# Altium PCB NPCB-CW308T-CC2538.PcbDoc
Units mil, origin at the board's own origin, x right, y up, seen from the top; angles counter-clockwise.
Board outline 2060 x 2540 mil, 2 copper layers (Top Layer, Bottom Layer); 40 components, 52 nets, 216 pads, 164 vias.
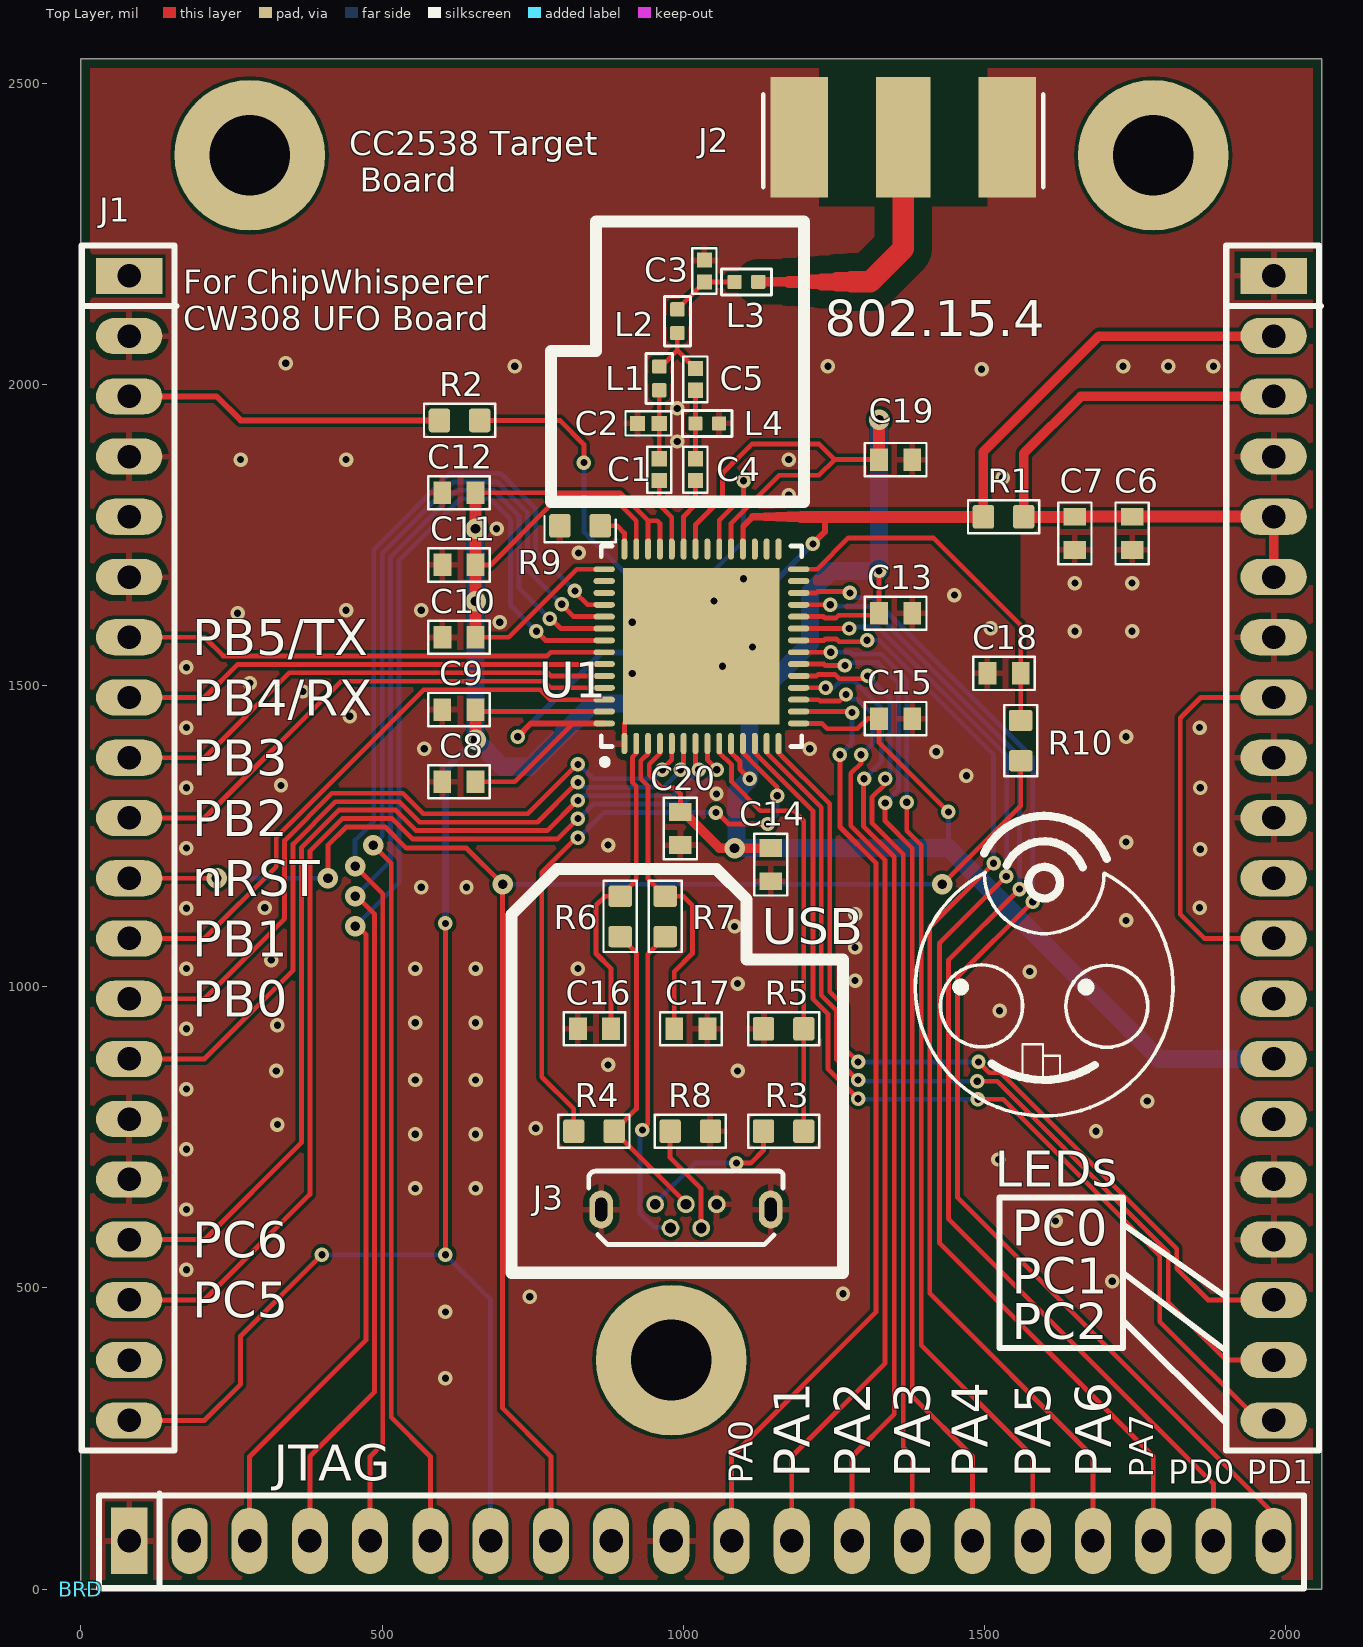
[diagram p0: Top Layer view]
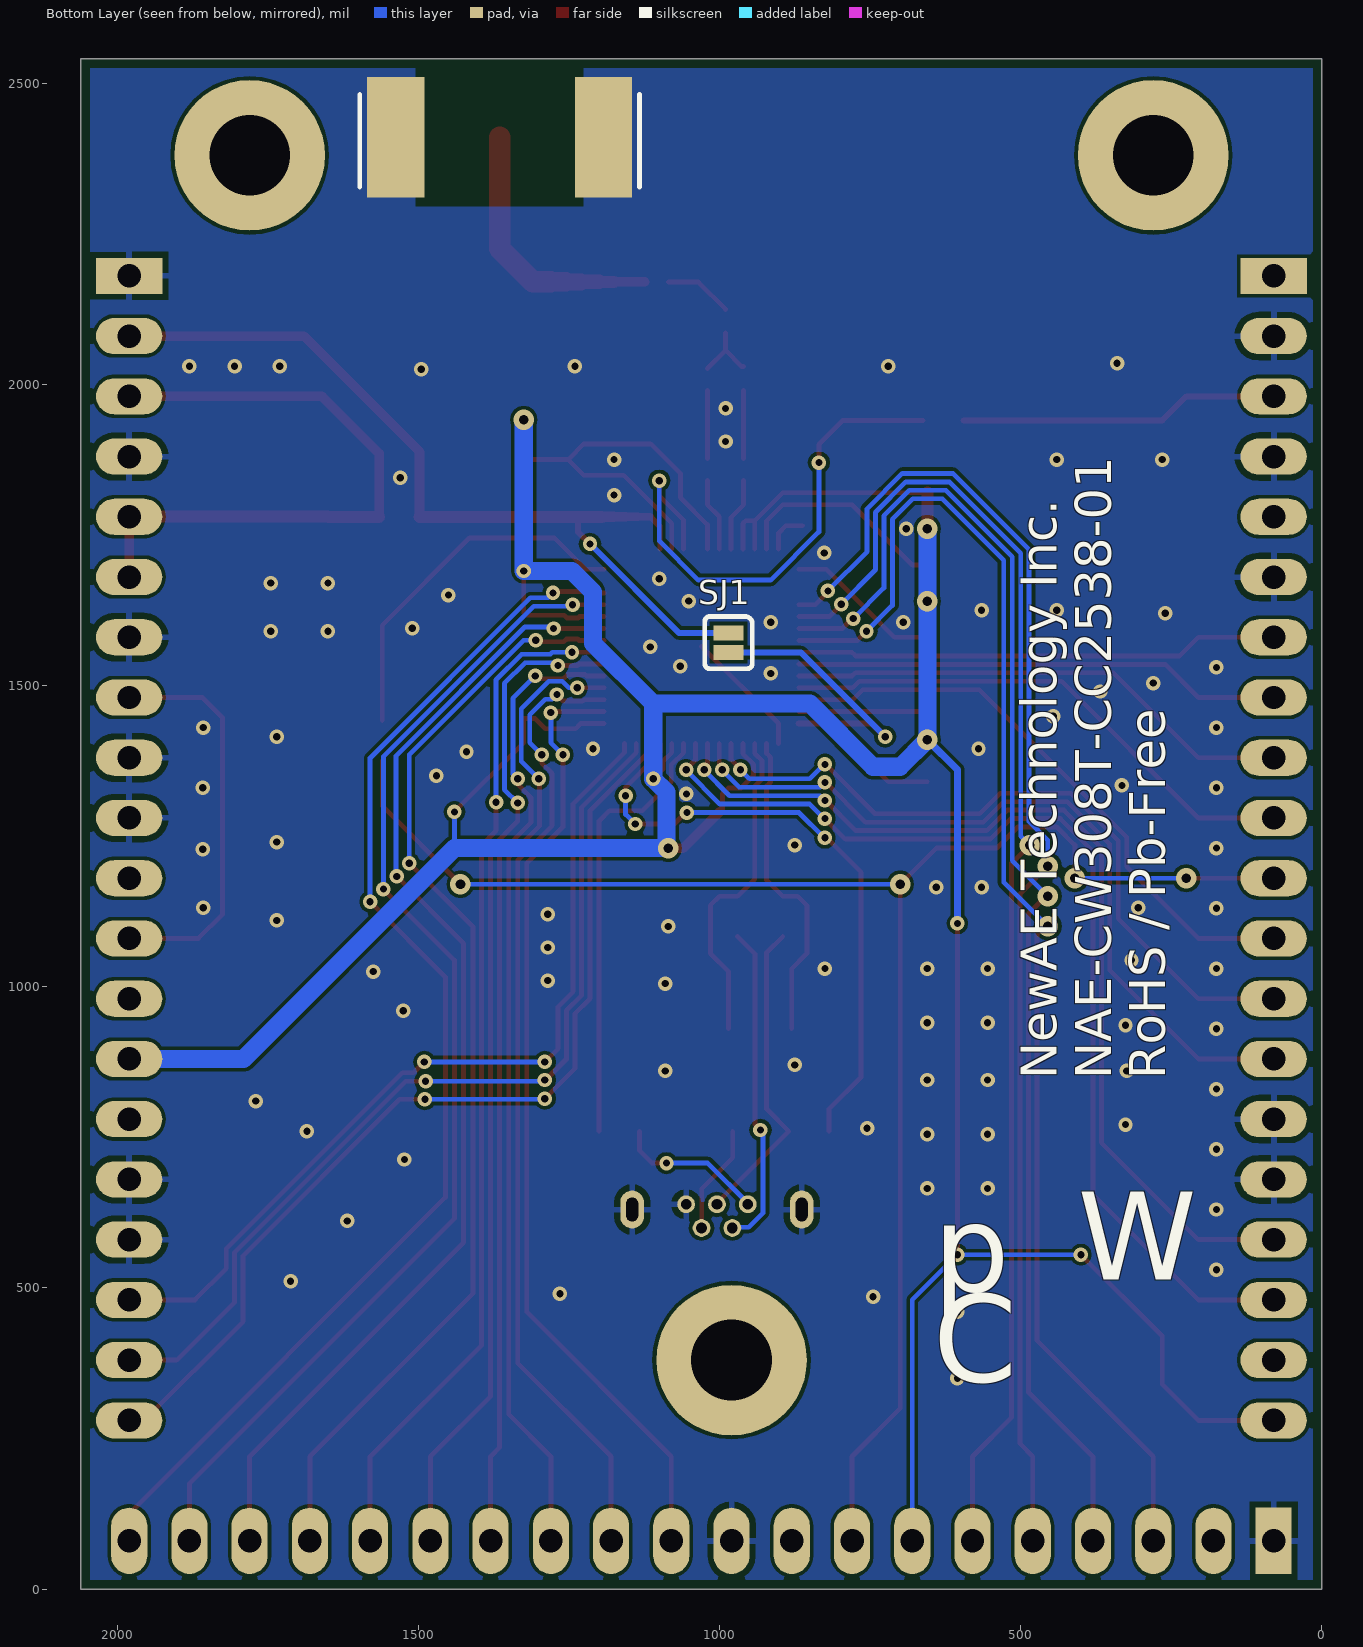
[diagram p1: Bottom Layer view, seen from below]

## Layer stack, top to bottom
Top Solder: solder mask 0.4, Solder Resist, Dk 3.5
Top Layer: signal copper 1.4
Dielectric 1: dielectric 12.6, FR-4, Dk 4.8
Bottom Layer: signal copper 1.4
Bottom Solder: solder mask 0.4, Solder Resist, Dk 3.5

## Board outline
0,0 0,2540 2060,2540 2060,0

## Design rules (kind name [scope] priority, off if disabled: settings)
BoardOutlineClearance J1_edge [InComponent('J1')] p1: gap=15 ignorepadtopadclearanceinfootprint=FALSE except(0: Arc-OutlineEdge Arc-SplitContinuation Track-SplitContinuation SMDPad-SplitContinuation THPad-SplitContinuation Via-SplitContinuation Fill-SplitContinuation Poly-SplitContinuation Region-SplitContinuation Text-SplitContinuation)
BoardOutlineClearance [All] p2: gap=15 ignorepadtopadclearanceinfootprint=FALSE except(0: Arc-SplitContinuation Track-SplitContinuation SMDPad-SplitContinuation THPad-SplitContinuation Via-SplitContinuation Fill-SplitContinuation Poly-SplitContinuation Region-SplitContinuation Text-SplitContinuation)
Clearance Clearance_FL [InNet('NetJ2_1')] p1: gap=6 ignorepadtopadclearanceinfootprint=TRUE except(0: Arc-Hole Track-Hole SMDPad-Hole THPad-Hole Via-Hole Fill-Hole Poly-Hole Region-Hole Text-Hole; 30: Arc-Fill Arc-Poly Arc-Region Track-Fill Track-Poly Track-Region)
Clearance [All] p2: gap=6 ignorepadtopadclearanceinfootprint=FALSE except(0: Arc-Hole Track-Hole SMDPad-Hole THPad-Hole Via-Hole Fill-Hole Poly-Hole Region-Hole Text-Hole)
HoleSize [All] p1: absolutevalues=TRUE maxlimit=200 minlimit=1 maxpercent=80.000 minpercent=20.000
MinimumSolderMaskSliver [All] p1: minsoldermaskwidth=5
PasteMaskExpansion PasteMaskExpansion_Nopaste [HasFootprint('CON-SMAM-PCB-EDGE062')] p1: expansion=-3937.01
PasteMaskExpansion [All] p2: expansion=0
PlaneConnect PlaneConnect_viaDirect [IsVia] p1: planeconnectstyle=Direct reliefexpansion=20 reliefentries=4 reliefconductorwidth=10 reliefairgap=10
PlaneConnect [All] p2: planeconnectstyle=Relief reliefexpansion=20 reliefentries=4 reliefconductorwidth=10 reliefairgap=10
PolygonConnect PolygonConnect_Directpart [HasFootprint('CON-SMAM-PCB-EDGE062') vs InNet('GND')] p1: connectstyle=Direct reliefconductorwidth=10 reliefentries=4 polygonreliefangle="90 Angle" airgapwidth=10
PolygonConnect PolygonConnect_viaDirect [All vs isVia] p2: connectstyle=Direct reliefconductorwidth=10 reliefentries=4 polygonreliefangle="90 Angle" airgapwidth=10
PolygonConnect [All] p3: connectstyle=Relief reliefconductorwidth=10 reliefentries=4 polygonreliefangle="90 Angle" airgapwidth=10
RoutingVias [All] p1: holewidth=28 width=50 viastyle="Through Hole" minholewidth=28 minwidth=50 maxholewidth=28 maxwidth=50 useviatemplates=TRUE viatemplateguid#1={00A2C811-F6DA-48CE-8B57-BE79917F5FCD} viatemplateguid#2={89223513-5D08-470A-9AA5-B5F4B4421E0B} viatemplateguid#3={82319E6E-4928-43D1-83BD-6C075DB5353F} viatemplatename#1=v61h30m0mx0 viatemplatename#2=v86h41m0mx0 viatemplatename#3=v127h71m0mx0
SilkToSilkClearance [All] p1: silktosilkclearance=5
SilkToSolderMaskClearance [IsPad] p1: minsilkscreentomaskgap=5 clearancetoexposedcopper=TRUE
SolderMaskExpansion [All] p1: expansion=4
Width Width_Power [InNet('VCC')] p1: maxlimit=50 minlimit=6 preferedwidth=20
Width [All] p2: maxlimit=100 minlimit=6 preferedwidth=8 minimp=50.000000 maximp=50.000000 favimp=50.000000
24 further rules are at their usual default settings.

## Classes and differential pairs
component class CW308T_CC2538_UFO: BRD J1

## Components (designator, comment, footprint, x,y, rotation, side; value= is the part's Value field where it differs from the comment)
BRD "" CW308T_TBOARD_DEFSIZE 0,0 r0 top locked
C1 "18p" CAPC0402_M 960,1858.11 r90 top
C2 "1p" CAPC0402_M 941.89,1935 r0 top
C3 "1p2" CAPC0402_M 1035,2188.11 r90 top
C4 "18p" CAPC0402_M 1020,1858.11 r90 top
C5 "1p" CAPC0402_M 1020,2008.11 r90 top
C6 "1u" CAPC0603_M 1745,1752.56 r270 top
C7 "100n" CAPC0603_M 1650,1752.56 r270 top
C8 "1u" CAPC0603_M 627.44,1340 r180 top
C9 "100n" CAPC0603_M 627.44,1460 r180 top
C10 "100n" CAPC0603_M 627.56,1580 r180 top
C11 "100n" CAPC0603_M 627.56,1700 r180 top
C12 "100n" CAPC0603_M 627.44,1820 r180 top
C13 "100n" CAPC0603_M 1352.56,1620 r0 top
C14 "100n" CAPC0603_M 1145,1202.56 r270 top
C15 "100n" CAPC0603_M 1352.44,1445 r0 top
C16 "47p" CAPC0603_M 852.44,930 r180 top
C17 "47p" CAPC0603_M 1012.44,930 r0 top
C18 "1n" CAPC0603_M 1532.44,1520 r180 top
C19 "100n" CAPC0603_M 1352.56,1875 r0 top
C20 "100n" CAPC0603_M 995,1262.56 r270 top
J1 "" CW308_TBOARD_CONN 80,2180 r0 top locked
J2 "CON-SMA-PCBEDGE-003.062" CON-SMAM-PCB-EDGE062 1365,2410 r90 top
J3 "614105150721" 614105150721 953.07,638.66 r0 top
L1 "2n" RESC1005X40N 960,2009.68 r90 top
L2 "2n" RESC1005X40N 990,2104.68 r90 top
L3 "3n3" RESC1005X40N 1104.68,2170 r0 top
L4 "2n" RESC1005X40N 1039.68,1935 r180 top
R1 "22R" RESC1608X55N 1531.54,1780 r0 top
R2 "100R" RESC1608X55N 628.46,1940 r180 top
R3 "47k" RESC1608X55N 1166.54,760 r0 top
R4 "1k5" RESC1608X55N 851.54,760 r180 top
R5 "68k" RESC1608X55N 1166.54,930 r180 top
R6 "33R" RESC1608X55N 895,1116.54 r270 top
R7 "33R" RESC1608X55N 970,1116.54 r90 top
R8 "1k5" RESC1608X55N 1011.54,760 r0 top
R9 "56k" RESC1608X55N 828.46,1765 r0 top
R10 "2k2" RESC1608X55N 1560,1408.46 r90 top
SJ1 "NO" SJ_2S_NO 985,1571.22 r270 bottom
U1 "CC2538SF53RT" QFN50P800X800X100_HS-57M 1030,1565 r90 top value=Value

## Footprints (in the part's own frame and the unit in brackets; to place one, negate y for a bottom-side part, rotate by r counter-clockwise, add the part's x,y. Pads: shape width x height; smd on the part's side, far side on the other; paste and mask are expansions set on the pad)
614105150721 [mm] "Upright USB"
  round 0.75 hole 0.45: 1(0,0) 2(0.65,-1) 3(1.3,0) 4(1.95,-1) 5(2.6,0)
  rrect100% 1x1.6 hole 0.5 slot 1 at 90 deg: S1(-2.275,-0.22) S2(4.875,-0.22)
  silkscreen extent -2.8,-1.7 5.4,1.4, body extent -2.7,-1.6 5.3,1.3, height 5.66
CAPC0402_M [mm] "Chip Capacitor, 2-Leads, Body 0402, IPC Medium Density"
  rect 0.64x0.64 smd mask+0.06: 1(-0.46,0) 2(0.46,0)
  silkscreen extent -0.97,-0.51 0.97,0.51, body extent -0.55,-0.3 0.55,0.3, height 0.6
CAPC0603_M [mm]
  rect 0.75x0.95 smd: 1(-0.7,0) 2(0.7,0)
  silkscreen extent -1.3,-0.7 1.3,0.7, body extent -0.85,-0.45 0.85,0.45, height 0.9
CON-SMAM-PCB-EDGE062 [mm] "Connector, SMA Edge Mount for 0.062\" Thick Board, 5-Lead"
  rect 5.08x2.29 smd: 1(0,0)
  rect 5.08x2.415 smd: 2(0,-4.383) 5(0,4.383)
  rect 5.08x2.415 smd far side: 3(0,-4.383) 4(0,4.383)
  silkscreen extent -2.1,-5.9 1.8,5.9, body extent -2.15,-4.8 15.3,4.72, height 4.34
CW308_TBOARD_CONN [mil]
  rect 110x60 hole 39: A1(0,0) C1(1900,0)
  oval 110x60 hole 39: A2(0,-100) A3(0,-200) A4(0,-300) A5(0,-400) A6(0,-500) A7(0,-600) A8(0,-700) A9(0,-800) A10(0,-900) A11(0,-1000) A12(0,-1100) A13(0,-1200) A14(0,-1300) A15(0,-1400) A16(0,-1500) A17(0,-1600) A18(0,-1700) A19(0,-1800) A20(0,-1900) C2(1900,-100) C3(1900,-200) C4(1900,-300) C5(1900,-400) C6(1900,-500) C7(1900,-600) C8(1900,-700) C9(1900,-800) C10(1900,-900) C11(1900,-1000) C12(1900,-1100) C13(1900,-1200) C14(1900,-1300) C15(1900,-1400) C16(1900,-1500) C17(1900,-1600) C18(1900,-1700) C19(1900,-1800) C20(1900,-1900)
  rect 60x110 hole 39: B1(0,-2100)
  oval 60x110 hole 39: B2(100,-2100) B3(200,-2100) B4(300,-2100) B5(400,-2100) B6(500,-2100) B7(600,-2100) B8(700,-2100) B9(800,-2100) B10(900,-2100) B11(1000,-2100) B12(1100,-2100) B13(1200,-2100) B14(1300,-2100) B15(1400,-2100) B16(1500,-2100) B17(1600,-2100) B18(1700,-2100) B19(1800,-2100) B20(1900,-2100)
  round 250 hole 134: MH1(200,200) MH2(1700,200) MH3(900,-1800)
  silkscreen extent -79,-2179 1979,50, body extent -50,-2149 1950,50, height 48
CW308T_TBOARD_DEFSIZE [mil] "Default CW308T Board Size"
  body extent 80,2523 90,2538, height 1
QFN50P800X800X100_HS-57M [mm] "QFN, 56-Leads, Body 8.00x8.00mm, Pitch 0.50mm, Thermal Pad 6.60x6.60mm, IPC Low Density"
  oval 0.9x0.25 smd paste-0.025 mask+0.051: 1(-4.1,3.25) 2(-4.1,2.75) 3(-4.1,2.25) 4(-4.1,1.75) 5(-4.1,1.25) 6(-4.1,0.75) 7(-4.1,0.25) 8(-4.1,-0.25) 9(-4.1,-0.75) 10(-4.1,-1.25) 11(-4.1,-1.75) 12(-4.1,-2.25) 13(-4.1,-2.75) 14(-4.1,-3.25) 29(4.1,-3.25) 30(4.1,-2.75) 31(4.1,-2.25) 32(4.1,-1.75) 33(4.1,-1.25) 34(4.1,-0.75) 35(4.1,-0.25) 36(4.1,0.25) 37(4.1,0.75) 38(4.1,1.25) 39(4.1,1.75) 40(4.1,2.25) 41(4.1,2.75) 42(4.1,3.25)
  oval 0.25x0.9 smd paste-0.025 mask+0.051: 15(-3.25,-4.1) 16(-2.75,-4.1) 17(-2.25,-4.1) 18(-1.75,-4.1) 19(-1.25,-4.1) 20(-0.75,-4.1) 21(-0.25,-4.1) 22(0.25,-4.1) 23(0.75,-4.1) 24(1.25,-4.1) 25(1.75,-4.1) 26(2.25,-4.1) 27(2.75,-4.1) 28(3.25,-4.1) 43(3.25,4.1) 44(2.75,4.1) 45(2.25,4.1) 46(1.75,4.1) 47(1.25,4.1) 48(0.75,4.1) 49(0.25,4.1) 50(-0.25,4.1) 51(-0.75,4.1) 52(-1.25,4.1) 53(-1.75,4.1) 54(-2.25,4.1) 55(-2.75,4.1) 56(-3.25,4.1)
  rect 6.6x6.6 smd paste-100 mask+0.051: 57(0,0)
  silkscreen extent -5,-4.23 4.23,4.23, body extent -4.1,-4.1 4.1,4.1, height 1
RESC1005X40N [mm] "Chip Resistor, Body 1.0x0.5mm, EIA 0402, IPC Medium Density"
  round 0.2 on Mech15: 0(0,0)
  rrect20% 0.6x0.6 smd: 1(-0.5,0) 2(0.5,0)
  Top Layer pour cut-out: -0.325,0.375 -0.2,0.5 0.2,0.5 0.325,0.375 0.325,-0.375 0.2,-0.5 -0.2,-0.5 -0.325,-0.375
  silkscreen extent -1.05,-0.55 1.05,0.55, body extent -0.52,-0.27 0.53,0.28, height 0.4
RESC1608X55N [mm] "Chip Resistor, Body 1.6x0.8mm, EIA 0603, IPC Medium Density"
  round 0.254 on Mech15: 0(0,0)
  rrect25% 0.9x1 smd: 1(-0.85,0) 2(0.85,0)
  Top Layer pour cut-out: -0.6,0.5 -0.4,0.7 0.4,0.7 0.6,0.5 0.6,-0.5 0.4,-0.7 -0.4,-0.7 -0.6,-0.5
  silkscreen extent -1.5,-0.7 1.5,0.7, body extent -0.87,-0.47 0.88,0.48, height 0.54
SJ_2S_NO [mil] "Solder Jumper, open (no paste)"
  rect 25x50 smd paste-393.7: 1(-16.22,0) 2(16.22,0)
  silkscreen extent -43,-39 43,39

## Part data
BRD: library part CW308T_BRDSHAPE_DEFAULT, "308T Board Outline (Layer 1)", Component Group=Mechanical, Component Type=Mechanical, Part Number=CW308T_BRDSHAPE_DEFAULT
C1 C4: library part CCHIP-18p-0402, "18p, 0402", Case-EIA=0402, Manufacture Part Number 1=GRM1555C1H180JA01D, Component Group=Capacitor, Component Type=Standard, Mounting Technology=SMT, Part Number=CCHIP-18p-0402, Pin Count=2
C2 C5: library part CCHIP-1p-0402, "1p, 0402", Case-EIA=0402, Manufacture Part Number 1=GRM1555C1H1R0BA01D, Component Group=Capacitor, Component Type=Standard, Mounting Technology=SMT, Part Number=CCHIP-1p-0402, Pin Count=2, RoHS=Yes
C3: library part CCHIP-1p2-0402, "1p2, 0402", Case-EIA=0402, Manufacture Part Number 1=GRM1555C1H1R2CA01D, Component Group=Capacitor, Component Type=Standard, Mounting Technology=SMT, Part Number=CCHIP-1p2-0402, Pin Count=2, RoHS=Yes
C6 C8: library part CCHIP-1u-0603, "1u, 0603", Case-EIA=0603, Case-Metric=1608, Manufacture Part Number 1=CL10A105KB8NNNC, Rated Voltage=50V, Supplier Part Number 1=1276-1860-1-ND, Component Group=Capacitor, Component Type=Standard, Mounting Technology=SMT, Part Number=CCHIP-1u-0603, Pin Count=2, Supplier 1=Digi-Key
C7 C9 C10 C11 C12 C13 C14 C15 C19 C20: library part CCHIP-100n-0603, "100n, 0603", Case-EIA=0603, Case-Metric=1608, Manufacture 1=Kemet, Manufacture Part Number 1=C0603C104K5RACTU, Rated Voltage=50V, Supplier Part Number 1=399-5089-2-ND, Component Group=Capacitor, Component Type=Standard, Mounting Technology=SMT, Part Number=CCHIP-100n-0603, Pin Count=2, Supplier 1=Digi-Key
C16 C17: library part CCHIP-47p-0603, "47p, 0603", Case-EIA=0603, Case-Metric=1608, Component Group=Capacitor, Component Type=Standard, Mounting Technology=SMT, Part Number=CCHIP-47p-0603, Pin Count=2
C18: library part CCHIP-1n-0603, "1n, 0603", Case-EIA=0603, Case-Metric=1608, Manufacture 1=Kemet, Rated Voltage=50V, Component Group=Capacitor, Component Type=Standard, Mounting Technology=SMT, Part Number=CCHIP-1n-0603, Pin Count=2, Supplier 1=Digi-Key
J1: library part CW308_TBOARD, "CW308 \"Standard\" Target Board Connector", Component Group=Mechanical, Component Type=Standard, Mounting Technology=Through-hole, Part Number=CW308_TBOARD, Pin Count=60, Pitch=2.54mm
J2: "SMA Female Edge Mount Connector for 0.062\" Thick Board", Component Group=Connector, ComponentLink1Description="Manufacturer URL", ComponentLink1URL=http://www.linxtechnologies.com/, ComponentLink2Description=Datasheet, ComponentLink2URL=http://www.connectorcity.com/diagrams/SMA/CONSMA003.062.pdf, Component Type=Standard, DatasheetVersion="rev1.0, Aug-2006", PackageDescription="SMA Female Edge Mount Connector for 0.062\" Thick Board, 7.9 mm Body Dia.", PackageReference=CON-SMA-EDGE062, PackageVersion="rev1.0, Aug-2006", Part Number=CON-SMA-PCBEDGE-003.062, PCB_Layout="Pads complies with manufacturer's recommendation.", Pin Count=5
J3: "USB, 5-pin, Upright", Manufacture 1="Wurth Electronics", Supplier Part Number 1=732-5958-1-ND, Component Group=Connector, Component Type=Standard, Manufacture Part Number 1=614105150721, Mounting Technology=Through-hole, Part Number=614105150721, Pin Count=7, PP Material Stack=0, PP Rotation=0, RoHS=Yes, Supplier 1=Digi-Key
L1 L2 L4: library part LCHIP-2n-0402, "2nF, 0402", Case-EIA=0402, Manufacture Part Number 1=LQG15HS2N0S02D, Component Group=Inductor, Component Type=Standard, Mounting Technology=SMT, Part Number=LCHIP-2n-0402, Pin Count=2, RoHS=Yes
L3: library part LCHIP-3n3-0402, "3.3nF, 0402", Case-EIA=0402, Manufacture Part Number 1=LQG15HS3N3S02D, Component Group=Inductor, Component Type=Standard, Mounting Technology=SMT, Part Number=LCHIP-3n3-0402, Pin Count=2, RoHS=Yes
R1: library part RCHIP-22R-0603, "22R res, 0603, 1%, 1/10W", Case-EIA=0603, Case-Metric=1608, Manufacture 1=Yageo, Manufacture Part Number 1=RC0603FR-0722RL, Rated Power=0.1W, Rated Voltage=75VDC, Supplier Part Number 1=311-22.0HRCT-ND, Temperature Range="-55C to 155C", Tolerance=1%, Component Group=Resistor, Component Type=Standard, Mounting Technology=SMT, Part Number=RCHIP-22R-0603, Pin Count=2, Supplier 1=Digi-Key
R2: library part RCHIP-100R-0603, "100R res, 0603, 1%, 1/10W", Case-EIA=0603, Case-Metric=1608, Manufacture 1=Yageo, Manufacture Part Number 1=RC0603FR-07100RL, Rated Power=0.1W, Rated Voltage=75VDC, Supplier Part Number 1=311-100HRCT-ND, Temperature Range="-55C to 155C", Tolerance=1%, Component Group=Resistor, Component Type=Standard, Mounting Technology=SMT, Part Number=RCHIP-100R-0603, Pin Count=2, Supplier 1=Digi-Key
R3: library part RCHIP-47K-0603, "47k res, 0603, 1%, 1/10W", Case-EIA=0603, Case-Metric=1608, Manufacture 1=Yageo, Manufacture Part Number 1=RC0603FR-0747KL, Rated Power=0.1W, Rated Voltage=75VDC, Supplier Part Number 1=311-47.0KHRCT-ND, Temperature Range="-55C to 155C", Tolerance=1%, Component Group=Resistor, Component Type=Standard, Mounting Technology=SMT, Part Number=RCHIP-47K-0603, Pin Count=2, Supplier 1=Digi-Key
R4 R8: library part RCHIP-1K5-0603, "1k5 res, 0603, 1%, 1/10W", Case-EIA=0603, Case-Metric=1608, Manufacture 1=Yageo, Manufacture Part Number 1=RC0603FR-071K5L, Rated Power=0.1W, Rated Voltage=75VDC, Supplier Part Number 1=311-1.50KHRCT-ND, Temperature Range="-55C to 155C", Tolerance=1%, Component Group=Resistor, Component Type=Standard, Mounting Technology=SMT, Part Number=RCHIP-1K5-0603, Pin Count=2, Supplier 1=Digi-Key
R5: library part RCHIP-68K-0603, "68k res, 0603, 1%, 1/10W", Case-EIA=0603, Case-Metric=1608, Manufacture 1=Yageo, Manufacture Part Number 1=RC0603FR-0768KL, Rated Power=0.1W, Rated Voltage=75VDC, Supplier Part Number 1=311-68.0KHRCT-ND, Temperature Range="-55C to 155C", Tolerance=1%, Component Group=Resistor, Component Type=Standard, Mounting Technology=SMT, Part Number=RCHIP-68K-0603, Pin Count=2, Supplier 1=Digi-Key
R6 R7: library part RCHIP-33R-0603, "33R res, 0603, 1%, 1/10W", Case-EIA=0603, Case-Metric=1608, Manufacture 1=Yageo, Manufacture Part Number 1=RC0603FR-0733RL, Rated Power=0.1W, Rated Voltage=75VDC, Supplier Part Number 1=311-33.0HRCT-ND, Temperature Range="-55C to 155C", Tolerance=1%, Component Group=Resistor, Component Type=Standard, Mounting Technology=SMT, Part Number=RCHIP-33R-0603, Pin Count=2, Supplier 1=Digi-Key
R9: library part RCHIP-56K-0603, "56k res, 0603, 1%, 1/10W", Case-EIA=0603, Case-Metric=1608, Manufacture 1=Yageo, Manufacture Part Number 1=RC0603FR-0756KL, Rated Power=0.1W, Rated Voltage=75VDC, Supplier Part Number 1=311-56KHRCT-ND, Temperature Range="-55C to 155C", Tolerance=1%, Component Group=Resistor, Component Type=Standard, Mounting Technology=SMT, Part Number=RCHIP-56K-0603, Pin Count=2, Supplier 1=Digi-Key
R10: library part RCHIP-2K2-0603, "2k2 res, 0603, 1%, 1/10W", Case-EIA=0603, Case-Metric=1608, Manufacture 1=Yageo, Manufacture Part Number 1=RC0603FR-072K2L, Rated Power=0.1W, Rated Voltage=75VDC, Supplier Part Number 1=311-2.20KHRCT-ND, Temperature Range="-55C to 155C", Tolerance=1%, Component Group=Resistor, Component Type=Standard, Mounting Technology=SMT, Part Number=RCHIP-2K2-0603, Pin Count=2, Supplier 1=Digi-Key
SJ1: library part SJ_2S_NO, "Solder Jumper, NO", Component Group="PCB Feature", Component Type="Standard (No BOM)", Mounting Technology=COPPER, Part Number=SJ_2S_NO, Pin Count=2
U1: library part CC2538SF53RTQT, "IC RF TXRX+MCU 802.15.4, ARM, ECC/AES/RSA", Manufacture 1="Texas Instruments", Manufacturer_Part_Number=cc2538_rtq_56, Supplier Part Number 1=296-35797-1-ND, Temperature Range="-40°C ~ 125°C", C="Copyright (C) 2015 Accelerated Designs. All rights reserved", Component Group="Digital IC", Component Type=Standard, Copyright="Copyright (C) 2015 Accelerated Designs. All rights reserved", Manufacture Part Number 1=CC2538SF53RTQT, Mounting Technology=SMT, Part Number=CC2538SF53RTQT, Pin Count=57, RefDes=RefDes, RoHS=Yes, Supplier 1=Digi-Key, Type=Type, Vendor="Texas Instruments"

## Via types
v1: diameter 24, hole 12, Top Layer to Bottom Layer, tented both sides, 145 vias
v2: diameter 34, hole 16, Top Layer to Bottom Layer, tented both sides, 13 vias
v3: diameter 24, hole 12, Top Layer to Bottom Layer, 6 vias

## Nets (pads, with @x,y where several pads share a name; then routed paths per layer and width w, separated by ;. In a path a pad name is that pad's centre, name@x,y a point inside that pad or via, vN(x,y) a via of type N, cw(c..) or ccw(c..) an arc to the next point about the centre after c; other vN are vias at no path point)
+5: J3.1 R3.1 | length 248.8
  Top Layer w8: v1(1088,707) 1112,707 1133.07,728.07 R3.1
  Bottom Layer w8: J3.1@952.64,640 1019.64,707 v1(1088,707)
CLK: J1.A3 R2.2 | length 531.6
  Top Layer w10: J1.A3 225,1980 265,1940 R2.2
CLK_IN: R2.1 U1.34 | length 890
  Top Layer w8: R2.1 795,1940 835,1900 v1(835,1870) ; U1.34 1059.53,1774.53 1100,1815 v1(1100,1840)
  Bottom Layer w8: v1(835,1870) 835,1755 915,1675 1035,1675 1100,1740 v1(1100,1840)
D+: J3.3 R4.1 R6.2 | length 518.8
  Top Layer w8: R6.2 922,1056.07 922,797 R4.1 1003.82,641.18 J3.3@1003.82,640
D-: J3.2 R7.1 | length 536.5
  Top Layer w8: v1(932,762) 941,771 941,1054.07 R7.1
  Bottom Layer w8: v1(932,762) 927.87,757.87 927.87,624.13 951.37,600.63 J3.2@978.23,600.63
GND: C2.1 C3.2 C6.2 C7.2 C8.2 C9.2 C10.2 C11.2 C12.2 C13.2 C14.2 C15.2 C16.2 C17.2 C18.2 C19.2 C20.2 J1.A2 J1.A4 J1.A6 J1.A15 J1.A16 J1.B1 J1.B10 J1.C1 J1.C4 J1.C7 J1.C9 J1.C10 J1.C16 J1.C17 J2.2 J2.3 J2.4 J2.5 J3.5 J3.S1 J3.S2 L4.1 R5.2 R8.2 R9.1 U1.1 U1.57 | length 214.4
  Top Layer w8: U1.1 902.05,1437.05 U1.57
  other v1: 605,350 605,460 745,485 1265,490 1712,511 175,530 1618,611 175,630 555,665 655,665 1523,713 175,730 555,755 655,755 1685,760 755,765 326,771 1770,810 175,830 555,845 655,845 324,860 1090,860 875,870 175,930 326,936 555,940 655,940 1525,960 1090,1005 1285,1010 1575,1025 175,1030 555,1030 655,1030 825,1030 316,1044 1285,1065 1085,1100 1735,1110 1285,1120 175,1130 305,1131 1857,1131 565,1165 640,1165 1858,1228 175,1230 875,1235 1735,1240 1055,1320 175,1330 1858,1330 332,1334 1470,1350 1420,1390 570,1395 1210,1395 1735,1415 175,1430 1857,1430 446,1449 368,1490 280,1504 175,1530 1650,1590 1745,1590 1510,1595 695,1605 260,1620 440,1625 565,1625 1450,1650 1650,1670 1745,1670 826,1720 690,1760 1175,1816 1530,1845 265,1875 440,1875 1175,1875 990,1905 990,1960 1495,2025 720,2030 1240,2030 1730,2030 1805,2030 1880,2030 340,2035
  other v3: 915,1520 1065,1532 1115,1564 915,1605 1051,1640 1100,1677
ID: J3.4 R8.1 | length 180.6
  Top Layer w8: R8.1 978.07,716 1029.41,664.66 J3.4@1029.41,600.63
NetC1_1: C1.1 U1.38 | length 122.2
  Top Layer w8: C1.1 960,1800 980.79,1779.21 U1.38
NetC1_2: C1.2 C2.2 L1.1 | length 113.8
  Top Layer w8: C1.2 C2.2 L1.1
NetC3_1: C3.1 L2.2 L3.1 | length 114.9
  Top Layer w8: L2.2@990,2125 L2.2 1035,2169.37 C3.1 L3.1
NetC4_1: C4.1 U1.37 | length 121.7
  Top Layer w8: U1.37 1000.47,1780.47 1020,1800 C4.1
NetC4_2: C4.2 C5.1 L4.2 | length 113.8
  Top Layer w8: C4.2 L4.2 C5.1
NetC5_2: C5.2 L1.2 L2.1 | length 112.3
  Top Layer w8: L1.2 963.15,2029.37 990,2056.22 ; L2.1 990,2056.22 ; C5.2 990,2056.22
NetC8_1: C8.1 SJ1.2 U1.56 | length 673
  Top Layer w8: C8.1 720,1340 817.05,1437.05
  Top Layer w10: v1(725,1415) 747.05,1437.05 817.05,1437.05 U1.56
  Bottom Layer w10: v1(725,1415) 865,1555 SJ1.2
NetJ1_C8: J1.C8 J1.C12 | length 666.7
  Top Layer w8: J1.C12 1865,1080 1825,1120 1825,1446 1859,1480 J1.C8
NetJ2_1: J2.1 L3.2 | length 448.4
  Top Layer w16: L3.2 1175,2170
  Top Layer w20: 1175,2170 1200,2170
  Top Layer w24: 1200,2170 1230,2170
  Top Layer w28: 1230,2170 1255,2170
  Top Layer w32: 1255,2170 1280,2170
  Top Layer w36: 1280,2170 1310,2170 1365,2225 J2.1
NetR9_2: R9.2 U1.42 | length 71.6
  Top Layer w8: R9.2 890,1765 902.05,1752.95 U1.42
nRST: J1.A11 J1.B8 R10.1 | length 2838.8
  Top Layer w8: J1.A11 v2(225,1180) ; v2(410,1180) 410,1235 440,1265 505,1265 540,1230 640,1230 v2(700,1170) 700,300 780,220 J1.B8 ; v2(1430,1170) 1560,1300 R10.1
  Bottom Layer w8: v2(225,1180) v2(410,1180) ; v2(700,1170) v2(1430,1170)
PA0: J1.B11 U1.16 | length 1596.8
  Top Layer w8: J1.B11 1080,220 1320,460 1320,1205 1260,1265 v1(1260,1385) ; U1.16 1278.27,1456.73 v1(1280,1455)
  Bottom Layer w8: v1(1260,1385) 1280,1405 v1(1280,1455)
PA1: J1.B12 U1.17 | length 1617.3
  Top Layer w8: J1.B12 1180,220 1335,375 1335,1210 1278,1267 1278,1354.11 1295,1371.11 v1(1295,1385) ; U1.17 1224.67,1476.42 1226.99,1474.1 1259.1,1474.1 v1(1270,1485)
  Bottom Layer w8: v1(1270,1485) 1278,1477 1289.11,1477 1315,1451.11 1315,1405 v1(1295,1385)
PA2: J1.B13 U1.18 | length 1605
  Top Layer w8: U1.18 v1(1236.1,1496.1) ; J1.B13 1280,220 1350,290 1350,1215.2 1299,1266.2 1299,1344 v1(1300,1345)
  Bottom Layer w8: v1(1236.1,1496.1) 1249.99,1496.1 1260.89,1507 1283.46,1507 1329,1461.46 1329,1374 v1(1300,1345)
PA3: J1.B14 U1.19 | length 1611.5
  Top Layer w8: U1.19 1221,1515.79 1223.32,1518.1 1252.1,1518.1 1259.04,1511.16 1301.16,1511.16 v1(1305.79,1515.79) ; v1(1335,1345) 1335,1336.11 1313,1314.11 1313,1272 1365,1220 1365,235 1380,220 J1.B14
  Bottom Layer w8: v1(1305.79,1515.79) 1343,1478.57 1343,1353 v1(1335,1345)
PA4: J1.B15 U1.20 | length 1675.4
  Top Layer w8: U1.20 1233.41,1535.47 1235.73,1533.16 v1(1268.16,1533.16) ; v1(1335,1305) 1335,1275 1380,1230 1380,320 1480,220 J1.B15
  Bottom Layer w8: v1(1268.16,1533.16) 1272.79,1537.79 1322.82,1537.79 1357,1503.6 1357,1327 v1(1335,1305)
PA5: J1.B16 U1.21 | length 1714.5
  Top Layer w8: U1.21 v1(1244.84,1555.16) ; v1(1371,1306) 1371,1259 1395,1235 1395,405 1580,220 J1.B16
  Bottom Layer w8: v1(1244.84,1555.16) 1277.27,1555.16 1280.64,1551.79 1328.61,1551.79 1371,1509.4 v1(1371,1306)
PA6: J1.B17 U1.22 | length 1867.5
  Top Layer w8: U1.22 1233.41,1574.84 1235.73,1577.16 1253.96,1577.16 1258.59,1572.53 1302.53,1572.53 v1(1305,1575) ; v1(1515,1205) 1409,1099 1409,491 1680,220 J1.B17
  Bottom Layer w8: v1(1305,1575) 1325.2,1575 1515,1385.2 v1(1515,1205)
PA7: J1.B18 U1.23 | length 1931.7
  Top Layer w8: U1.23 v1(1275.47,1594.53) ; v1(1536,1183) 1425,1072 1425,575 1780,220 J1.B18
  Bottom Layer w8: v1(1275.47,1594.53) 1277.94,1597 1323,1597 1537,1383 1537,1184 v1(1536,1183)
PB0: J1.A13 U1.5 | length 1216.6
  Top Layer w8: J1.A13 205,980 338,1113 338,1242.4 416.6,1321 534,1321 568,1287 741.89,1287 823.89,1369 v1(825,1369) ; v1(965.32,1360) 965.32,1361.11 980.79,1376.59 U1.5
  Bottom Layer w8: v1(825,1369) 826.11,1369 850.11,1345 950.32,1345 v1(965.32,1360)
PB1: J1.A12 U1.54 | length 995.3
  Top Layer w8: J1.A12 205,1080 324,1199 324,1248.2 568.8,1493 762.2,1493 778.78,1476.42 U1.54
PB2: J1.A10 U1.53 | length 887.1
  Top Layer w8: J1.A10 205,1280 432,1507 768,1507 778.9,1496.1 U1.53
PB3: J1.A9 U1.52 | length 849.1
  Top Layer w8: J1.A9 205,1380 346,1521 774.79,1521 780,1515.79 U1.52
PB4: J1.A8 U1.51 | length 811.6
  Top Layer w8: J1.A8 205,1480 260,1535 846.39,1535 846.87,1535.47 U1.51
PB5: J1.A7 U1.50 | length 804
  Top Layer w8: J1.A7 205,1580 236,1549 774,1549 780.16,1555.16 U1.50
PC0: J1.C18 U1.14 | length 1456.1
  Top Layer w8: U1.14 1157.95,1388.44 1243,1303.4 1243,991.6 1268,966.6 1268,897 v1(1290,875) ; v1(1490,875) 1508,857 1526.8,857 1819,564.8 1819,532 1871,480 J1.C18
  Bottom Layer w8: v1(1290,875) v1(1490,875)
PC1: J1.C19 U1.13 | length 1553.3
  Top Layer w8: U1.13 1138.27,1388.33 1229,1297.6 1229,985.8 1254,960.8 1254,879.89 1288.89,845 v1(1290,845) ; v1(1488,843) 1521,843 1805,559 1805,476 1901,380 J1.C19
  Bottom Layer w8: v1(1290,845) 1292,843 v1(1488,843)
PC2: J1.C20 U1.12 | length 1635.8
  Top Layer w8: U1.12 1118.58,1388.81 1122,1385.4 1122,1384.8 1215,1291.8 1215,980 1240,955 1240,863.89 1289.89,814 v1(1290,814) ; v1(1489,813) 1531.2,813 1791,553.2 1791,444 1955,280 J1.C20
  Bottom Layer w8: v1(1290,814) 1291,813 v1(1489,813)
PC3: R4.2 U1.11 | length 1040.6
  Top Layer w8: R4.2 818.07,796.93 765,850 765,1190 823,1248 v1@827,1248 ; v1(1054,1289) 1055,1290 1075,1270 v1(1140,1270) ; U1.11 1098.9,1388.7 1108,1379.6 1108,1379 1156,1331 v1(1156,1317)
  Bottom Layer w8: v1@827,1248 868,1289 v1(1054,1289) ; v1(1140,1270) 1156,1286 v1(1156,1317)
  other v1: 825,1247
PC4: R3.2 R5.1 U1.9 | length 734
  Top Layer w8: U1.9 1059.53,1388.47 1080,1368 1080,1340 1128,1292 1183,1292 1200,1275 R5.1 R3.2
PC5: J1.A18 U1.8 | length 1752.5
  Top Layer w8: J1.A18 205,480 380,655 380,1225 434,1279 516.6,1279 550.6,1245 791,1245 v1(825,1279) ; U1.8 1039.84,1376.59 1055.32,1361.11 v1(1055.32,1360)
  Bottom Layer w8: v1(825,1279) 826.11,1279 850.11,1303 999.43,1303 1055.32,1358.89 v1(1055.32,1360)
PC6: J1.A17 U1.7 | length 1629.9
  Top Layer w8: J1.A17 205,580 366,741 366,1230.8 428.2,1293 522.4,1293 556.4,1259 773.89,1259 823.89,1309 v1(825,1309) ; U1.7 1020.16,1365.16 v1(1025.32,1360)
  Bottom Layer w8: v1(825,1309) 833,1317 983.43,1317 1025.32,1358.89 v1(1025.32,1360)
PC7: J1.A14 U1.6 | length 1318.1
  Top Layer w8: J1.A14 205,880 352,1027 352,1236.6 422.4,1307 528.2,1307 562.2,1273 757.89,1273 823.89,1339 v1(825,1339) ; v1(995.32,1360) 1000.47,1365.16 U1.6
  Bottom Layer w8: v1(825,1339) 833,1331 967.43,1331 995.32,1358.89 v1(995.32,1360)
PD0: J1.B19 U1.25 | length 2003.9
  Top Layer w8: U1.25 v1(1243.9,1633.9) ; v1(1558,1162) 1440,1044 1440,615 1880,175 J1.B19
  Bottom Layer w8: v1(1243.9,1633.9) 1246.21,1631.58 1308.22,1631.58 1558,1381.8 v1(1558,1162)
PD1: J1.B20 U1.26 | length 2072.8
  Top Layer w8: U1.26 1220.58,1653.58 1222.9,1655.9 1274.1,1655.9 v1(1276.42,1653.58) ; v1(1580,1141) 1455,1016 1455,650 1980,125 J1.B20
  Bottom Layer w8: v1(1276.42,1653.58) 1284.42,1645.58 1314.02,1645.58 1580,1379.6 v1(1580,1141)
Reset: C18.1 R10.2 U1.28 | length 608.3
  Top Layer w8: U1.28 1221.95,1692.95 1274,1745 1415,1745 1560,1600 C18.1 R10.2
SHUNTH: C6.1 C7.1 J1.C3 J1.C5 J1.C6 R1.2 | length 1074.4
  Top Layer w16: R1.2 1565,1885 1660,1980 J1.C3 ; J1.C5@1979.88,1780.12 J1.C5 J1.C6
  Top Layer w20: R1.2 1649.88,1780 C7.1 C6.1 J1.C5@1979.88,1780.12
SHUNTL: J1.C2 R1.1 SJ1.1 U1.32 | length 1457.2
  Top Layer w8: U1.32 1099,1726.52 1099,1764 1100,1765
  Top Layer w10: 1100,1765 1115,1780 ; v1(1215,1735) 1235,1755 1235,1780
  Top Layer w12: 1115,1780 1135,1780
  Top Layer w14: 1135,1780 1155,1780
  Top Layer w16: 1155,1780 1175,1780 ; R1.1 1498.07,1888.07 1690,2080 J1.C2
  Top Layer w18: 1175,1780 1195,1780
  Top Layer w20: 1195,1780 1235,1780 R1.1
  Bottom Layer w10: SJ1.1 1067.43,1587.43 v1(1215,1735)
TCK: J1.B6 U1.47 | length 2252.1
  Top Layer w8: v2(485,1235) 515,1205 515,285 580,220 J1.B6 ; v1(798,1635) 798,1634 817.79,1614.21 U1.47
  Bottom Layer w8: v2(485,1235) 500,1250 500,1719.6 618.4,1838 690.6,1838 741,1787.6 741,1692 v1(798,1635)
TDI: J1.B3 U1.49 | length 2316.6
  Top Layer w8: J1.B3 280,220 473,413 473,1087 v2@453,1107 ; v1(756,1590) 771.16,1574.84 U1.49
  Bottom Layer w8: v2@453,1107 462,1107 528,1173 528,1708 630,1810 679,1810 713,1776 713,1633 v1(756,1590)
  other v2: 455,1100
TDO: J1.B4 U1.48 | length 2285.7
  Top Layer w8: J1.B4 380,220 487,327 487,1121 v2@454,1154 ; v1(778,1611) 780,1611 796.47,1594.53 U1.48
  Bottom Layer w8: v2(455,1150) 514,1209 514,1713.8 624.2,1824 684.8,1824 727,1781.8 727,1662 v1(778,1611)
TMS: J1.B5 U1.46 | length 2254.3
  Top Layer w8: v2(455,1200) 501,1154 501,241 480,220 J1.B5 ; v1(820,1657) 820,1655 841.1,1633.9 U1.46
  Bottom Layer w8: v2(455,1200) 455,1243.18 486,1274.18 486,1725.4 612.6,1852 696.4,1852 755,1793.4 755,1722 v1(820,1657)
USB_N: C17.1 R7.2 U1.3 | length 544.1
  Top Layer w8: U1.3 941.42,1387.01 929.32,1374.91 929.32,1345.09 941.42,1332.99 941.42,1178.58 R7.2 1000,1150 1015,1135 1015,1055 984.88,1024.88 C17.1
USB_P: C16.1 R6.1 U1.2 | length 531.5
  Top Layer w8: C16.1 880,1030 855,1055 855,1135 870,1150 R6.1 921.73,1176.73 921.73,1332.87 915.32,1339.29 915.32,1380.71 921.73,1387.13 U1.2
VCC: C9.1 C10.1 C11.1 C12.1 C13.1 C14.1 C15.1 C19.1 C20.1 J1.A20 J1.B7 J1.C14 U1.4 U1.10 U1.15 U1.24 U1.33 U1.36 U1.39 U1.40 U1.41 U1.43 U1.55 | length 8150.5
  Top Layer w8: J1.A20 205,280 265,340 265,420 v1(400,555) ; v1(605,555) v1(605,1105) ; C9.1 658.27,1456.73 U1.55 ; C11.1@655,1700 C11.1 680,1700 780,1800 895,1800 921.73,1773.27 U1.41 ; C12.1 895,1820 941.42,1773.58 ; C10.1 710,1580 822.95,1692.95 U1.43 ; U1.40 941.42,1773.58 ; U1.4 961.1,1386.9 943.32,1369.11 943.32,1350.89 964.2,1330 985,1330 995,1320 C20.1 ; U1.39 961.1,1768.9 956.42,1773.58 941.42,1773.58 ; U1.36 1020.16,1767.16 1065,1812 1065,1852 1114,1901 1225,1901 1251,1875 ; U1.10 1079.21,1388.59 1094,1373.8 1094,1361 v1(1110,1345) ; U1.33 1079.21,1769.21 1159,1849 1225,1849 1251,1875 ; U1.15 1229.95,1437.05 1239,1428 1289,1428 1306,1445 C15.1 1325,1445 1325,1405 v1(1440,1290) ; U1.24 1232.47,1614.21 1234.79,1611.9 1253.01,1611.9 1257.64,1616.53 1321.53,1616.53 C13.1 v1(1325,1690) ; C19.1 1251,1875
  Top Layer w16: C20.1@999.88,1290.12 1060,1230 v2(1085,1230) C14.1@1144.88,1230
  Top Layer w20: v2(655,1410) C9.1 ; C12.1 v2(655,1760) 655,1700 v2(655,1640) 655.12,1639.88 C10.1 ; C14.1@1144.88,1230 C14.1 ; C19.1 v2(1325,1941)
  Bottom Layer w8: v1(400,555) v1(605,555) 680,480 J1.B7 ; 1440,1230 v1(1440,1290)
  Bottom Layer w12: v1(605,1105) 605,1360 v2(655,1410)
  Bottom Layer w30: v2(655,1760) v2(655,1640) v2(655,1410) 700,1365 745,1365 850,1470 1110,1470 ; v2(1325,1941) v1(1325,1690) 1245,1690 1210,1655 1210,1570 1110,1470 ; J1.C14 1790,880 1440,1230 v2(1085,1230) 1088.32,1233.32 1088.32,1323.32 v1(1110,1345) 1110,1470
pads on no net: J1.A1 J1.A5 J1.A19 J1.B2 J1.B9 J1.C11 J1.C13 J1.C15 J1.MH1 J1.MH2 J1.MH3 L1.0 L2.0 L3.0 L4.0 R1.0 R2.0 R3.0 R4.0 R5.0 R6.0 R7.0 R8.0 R9.0 R10.0 U1.27 U1.29 U1.30 U1.31 U1.35 U1.44 U1.45

## Polygon pours and split planes (outlines as drawn)
GND on Bottom Layer "Bottom Layer-GND" (solid, pour order 6): 0,2540 1225,2540 1225,2295 1505,2295 1505,2540 2060,2540 2060,0 0,0
GND on Top Layer "Top Layer-GND" (solid, remove dead copper, pour order 2): 0,2540 1225,2540 1225,2295 1505,2295 1505,2540 2060,2540 2060,0 0,0

## Other copper
Top Layer:
  pour cut-out: 1098.9,1726.42 1098.9,1763.9 1115,1780 1560,1780 1560,1600 1415,1745 1274,1745 1221.95,1692.95 1191.42,1692.95

## Silkscreen, mask and mechanical layers (free items; w line width, h text height)
Top Overlay:
  circle w6: c1494.98,968.09 r68.1
  circle w13.87: c1460.3,999.29 r7.15
  circle w13.87: c1668.34,999.29 r7.15
  circle w6: c1703.01,967.39 r68.1
  circle w13.87: c1599,1172.66 r26.29
  lines w3.47: 1563.28,852.63 1563.28,904.29 1597.26,904.29 1597.26,845.35 1597.26,885.22 1625,885.22 1625,845
  lines w6: 1499.75,1187.22 ccw(c1599,1187.22) 1698.24,1187.22 ; 1501.01,1189.45 ccw(c1599,999.29) 1699.2,1188.29
  lines w10: 1730,445 1901.26,275 ; 1730,525 1901.26,395 ; 1730,605 1901.26,485 ; 1525,400 1525,650 1730,650 1730,400 1525,400
  lines w13.87: 1499.32,1221.4 cw(c1599,1172.66) 1702.81,1211.81 ; 1511.49,872.33 ccw(c1599,999.29) 1682.72,869.8 ; 1536.69,1201.66 cw(c1599,1172.66) 1662.76,1198.3
  lines w20: 715,525 715,1120 730,1135 790,1195 1055,1195 1105,1145 1105,1045 1265,1045 1265,525 715,525 ; 780,1805 1200,1805 1200,2270 855,2270 855,2055 780,2055 780,1805
  text "CC2538 Target /  Board" at 445,2320 h40
  text "For ChipWhisperer / CW308 UFO Board" at 170,2090 h40
  text "802.15.4" at 1235,2080 h60
  text "PB5/TX" at 185,1550 h60
  text "PB4/RX" at 185,1450 h60
  text "PB3" at 185,1350 h60
  text "PB2" at 185,1250 h60
  text "nRST" at 185,1150 h60
  text "USB" at 1130,1070 h60
  text "PB1" at 185,1050 h60
  text "PB0" at 185,950 h60
  text "LEDs" at 1517,668 h60
  text "PC0" at 1545,570 h60
  text "PC6" at 185,550 h60
  text "PC1" at 1545,490 h60
  text "PC5" at 185,450 h60
  text "PC2" at 1545,415 h60
  text "PA1" at 1210,185 h60 r90
  text "PA2" at 1310,185 h60 r90
  text "PA3" at 1410,185 h60 r90
  text "PA4" at 1505,185 h60 r90
  text "PA5" at 1610,185 h60 r90
  text "PA6" at 1710,185 h60 r90
  text "PA7" at 1780,185 h40 r90
  text "JTAG" at 320,180 h60
  text "PA0" at 1115,175 h40 r90
  text "PD0" at 1805,175 h40
  text "PD1" at 1935,175 h40
Bottom Overlay:
  text "NewAE Technology Inc.  / NAE-CW308T-CC2538-01 / RoHS / Pb-Free" at 260,846 h60 r270
  text "W" at 405,465 h250
  text "p" at 645,445 h250
  text "C" at 645,295 h250
Mechanical 1:
  the board outline again, w11.81